# Altium PCB Venato_PCB_v1.PcbDoc (part 2 of 2)
Units mm, origin at the board's own origin, x right, y up, seen from the top; angles counter-clockwise.
Board outline 80 x 50 mm, 2 copper layers (Top Layer, Bottom Layer); 79 components, 70 nets, 349 pads, 0 vias.
Unrouted connection lines stored in the file: 190.
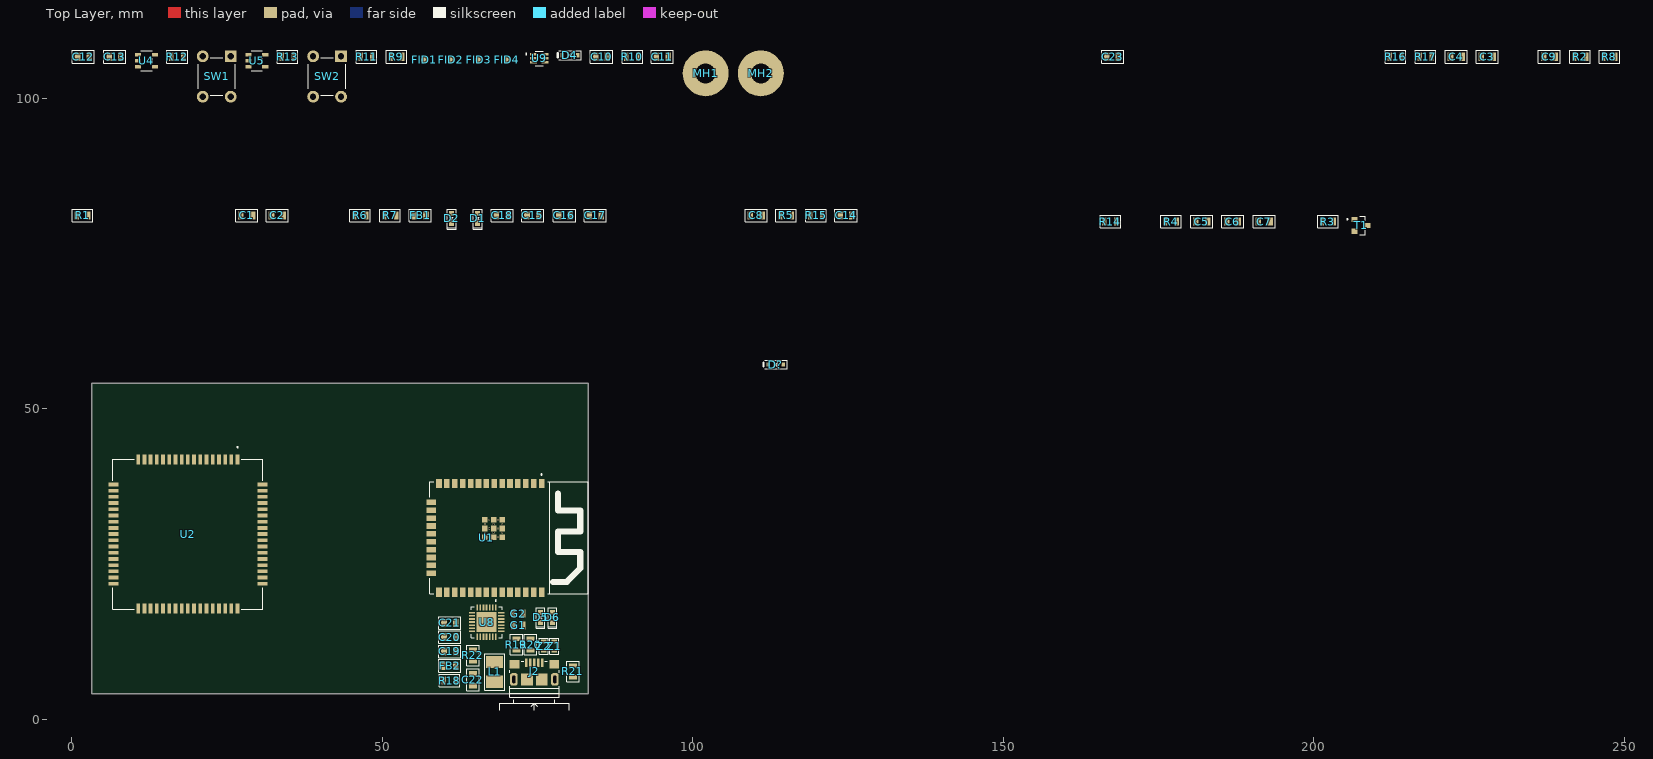
[diagram p0: Top Layer view]

## Part data (continued)
R8: library part RC0805FR-071K2L, "Res Thick Film 0805 1.2K Ohm 1% 0.125W(1/8W) ±100ppm/C Pad SMD T/R", Case Code (Imperial)=0805, Case Code (Metric)=2012, Manufacturer=Yageo, Max Operating Temperature=155°C, Max Power Dissipation=125mW, Min Operating Temperature=-55°C, Package Quantity=1, Resistance=1.2kR, Resistance Tolerance=1%, Resistor Type="Thick Film", Supplier Part Number 1=603-RC0805FR-071K2L, Temperature Coefficient=100ppm/°C, Voltage Rating=150V, Case/Package=0805, Category="Chip SMD Resistors", ComponentLink1Description=https://datasheet.ciiva.com/11808/0900766b8106beab-11808865.pdf?src-supplier=RSComponents, ComponentLink1URL=https://datasheet.ciiva.com/11808/0900766b8106beab-11808865.pdf?src-supplier=RSComponents, ComponentLink2Description=https://datasheet.ciiva.com/2457/pyu-r-int-thick-7-2457192.pdf?src-supplier=Digi-Key, ComponentLink2URL=https://datasheet.ciiva.com/2457/pyu-r-int-thick-7-2457192.pdf?src-supplier=Digi-Key, ComponentLink3Description=https://datasheet.ciiva.com/2457/pyu-r-int-thick-7-2457193.pdf?src-supplier=Digi-Key, ComponentLink3URL=https://datasheet.ciiva.com/2457/pyu-r-int-thick-7-2457193.pdf?src-supplier=Digi-Key, ComponentLink4Description=https://datasheet.ciiva.com/2457/pyu-r-int-thick-7-2457191.pdf?src-supplier=Digi-Key, ComponentLink4URL=https://datasheet.ciiva.com/2457/pyu-r-int-thick-7-2457191.pdf?src-supplier=Digi-Key, ComponentLink5Description=https://datasheet.ciiva.com/12656/rc0805-12656886.pdf?src-supplier=Mouser, ComponentLink5URL=https://datasheet.ciiva.com/12656/rc0805-12656886.pdf?src-supplier=Mouser, ComponentLink6Description=https://datasheet.ciiva.com/15189/getdatasheetpartid-348582-15189915.pdf?src-supplier=Verical, ComponentLink6URL=https://datasheet.ciiva.com/15189/getdatasheetpartid-348582-15189915.pdf?src-supplier=Verical, Construction=Rectangular, Depth=1.25mm, Features="Moisture Resistant", Height=0.024inch, Lead Free="Lead Free", Length=0.079inch, Manufacturer Part Number=RC0805FR-071K2L, Military Standard=Not, Number of Terminations=2, Packaging="Tape and Reel", Power Rating=125mW, Pricing 1="1=0.10000, 10=0.02900, 50=0.02900, 100=0.01400, 1000=0.00600, 10000=0.00300 (USD)", RoHS=Yes, RoHS Compliant=Yes, Series=RC, Stock 1=795, Supplier 1=Mouser, Technology="THICK FILM", Termination=SMD/SMT, Tolerance=1%, Width=0.049inch, Working Voltage=150V
R9 R10 R15: library part RC0805FR-071KL, "Res Thick Film 0805 1KOhm 1% 0.125W(1/8W) 100ppm/C Epoxy Pad SMD T/R", Case Code (Imperial)=0805, Case Code (Metric)=2012, Manufacturer=Yageo, Max Operating Temperature=155°C, Max Power Dissipation=125mW, Min Operating Temperature=-55°C, Package Quantity=1, Resistance=1kR, Resistance Tolerance=1%, Resistor Type="Thick Film", Supplier Part Number 1=311-1.00KCRTR-ND, Temperature Coefficient=100ppm/°C, Voltage Rating=150V, Case/Package=0805, Category="Chip SMD Resistors", Construction=Rectangular, Depth=1.25mm, Features="Moisture Resistant", Height=0.024inch, Lead Free="Lead Free", Length=0.079inch, Manufacturer Part Number=RC0805FR-071KL, Military Standard=Not, Number of Pins=2, Number of Terminations=2, Packaging="Tape and Reel", Power Rating=125mW, Pricing 1="5000=0.00544 (USD)", REACH SVHC=Unknown, RoHS=Yes, RoHS Compliant=Yes, Series=RC, Size Code=0805, Stock 1=5664551, Supplier 1=Digi-Key, Termination=SMD/SMT, Tolerance=1%, Voltage Rating (DC)=150V, Width=0.049inch
R11 R16 R17: library part RC0805FR-07560RL, "Res General Purpose Thick Film 0805 560 Ohm 1% 1/8W ±100ppm/°C Molded Paper T/R", Case Code (Imperial)=0805, Case Code (Metric)=2012, Manufacturer=Yageo, Max Operating Temperature=155°C, Max Power Dissipation=125mW, Min Operating Temperature=-55°C, Package Quantity=1, Resistance=560R, Resistance Tolerance=1%, Resistor Type="Thick Film", Supplier Part Number 1=311-560CRCT-ND, Temperature Coefficient=100ppm/°C, Voltage Rating=150V, Case/Package=0805, Category="Chip SMD Resistors", Construction=Rectangular, Depth=1.25mm, Features="Moisture Resistant", Height=0.024inch, Lead Free="Lead Free", Length=2mm, Manufacturer Part Number=RC0805FR-07560RL, Military Standard=Not, Number of Terminations=2, Packaging="Tape and Reel", Power Rating=125mW, Pricing 1="1=0.10000, 10=0.04200, 100=0.01690, 1000=0.00759, 2500=0.00659 (USD)", REACH SVHC=Unknown, RoHS=Yes, RoHS Compliant=Yes, Series=RC, Size Code=0805, Stock 1=450592, Supplier 1=Digi-Key, Termination=SMD/SMT, Tolerance=1%, Weight=0.000194oz, Width=0.049inch
R14: library part RC0805FR-07100RL, "Res Thick Film 0805 100 Ohm 1% 1/8W ±100ppm/°C Molded SMD Paper T/R", Case Code (Imperial)=0805, Case Code (Metric)=2012, Manufacturer=Yageo, Max Operating Temperature=155°C, Max Power Dissipation=125mW, Min Operating Temperature=-55°C, Package Quantity=5000, Resistance=100R, Resistor Type="Thick Film", Supplier Part Number 1=603-RC0805FR-07100RL, Temperature Coefficient=100ppm/°C, Tolerance=1%, Voltage Rating=150V, Application(s)="HIGH RELIABILITY", Case/Package=0805, Category="Chip SMD Resistors", ComponentLink1Description=https://datasheet.ciiva.com/11808/0900766b8106beab-11808877.pdf?src-supplier=RSComponents, ComponentLink1URL=https://datasheet.ciiva.com/11808/0900766b8106beab-11808877.pdf?src-supplier=RSComponents, ComponentLink2Description=https://datasheet.ciiva.com/7941/1697719-7941680.pdf?src-supplier=Element14, ComponentLink2URL=https://datasheet.ciiva.com/7941/1697719-7941680.pdf?src-supplier=Element14, ComponentLink3Description=https://datasheet.ciiva.com/7660/38627-7660797.pdf?src-supplier=Element14, ComponentLink3URL=https://datasheet.ciiva.com/7660/38627-7660797.pdf?src-supplier=Element14, ComponentLink4Description=https://datasheet.ciiva.com/2456/pyu-r-int-thick-7-2456987.pdf?src-supplier=Digi-Key, ComponentLink4URL=https://datasheet.ciiva.com/2456/pyu-r-int-thick-7-2456987.pdf?src-supplier=Digi-Key, ComponentLink5Description=https://datasheet.ciiva.com/17082/rc0805-17082697.pdf?src-supplier=Future+Electronics, ComponentLink5URL=https://datasheet.ciiva.com/17082/rc0805-17082697.pdf?src-supplier=Future+Electronics, ComponentLink6Description=https://datasheet.ciiva.com/7941/1686128-7941679.pdf?src-supplier=Element14, ComponentLink6URL=https://datasheet.ciiva.com/7941/1686128-7941679.pdf?src-supplier=Element14, ComponentLink7Description=https://datasheet.ciiva.com/22747/444164-22747535.pdf?src-supplier=Element14, ComponentLink7URL=https://datasheet.ciiva.com/22747/444164-22747535.pdf?src-supplier=Element14, ComponentLink8Description=https://datasheet.ciiva.com/46447/444164-46447562.pdf?src-supplier=Element14, ComponentLink8URL=https://datasheet.ciiva.com/46447/444164-46447562.pdf?src-supplier=Element14, ComponentLink9Description=https://datasheet.ciiva.com/2456/pyu-r-int-thick-7-2456988.pdf?src-supplier=Digi-Key, ComponentLink9URL=https://datasheet.ciiva.com/2456/pyu-r-int-thick-7-2456988.pdf?src-supplier=Digi-Key, ComponentLink10Description=https://datasheet.ciiva.com/2456/pyu-r-int-thick-7-2456989.pdf?src-supplier=Digi-Key, ComponentLink10URL=https://datasheet.ciiva.com/2456/pyu-r-int-thick-7-2456989.pdf?src-supplier=Digi-Key, Depth=1.25mm, Features="Moisture Resistant", Height=0.5mm, Lead Free="Lead Free", Lead Pitch=0.4mm, Length=2mm, Manufacturer Part Number=RC0805FR-07100RL, Military Standard=Not, Number of Pins=2, Number of Terminations=2, Packaging="Cut Tape", Power Rating=125mW, Pricing 1="1=0.13000, 10=0.04400, 50=0.04400, 100=0.01800, 1000=0.00900, 10000=0.00500 (USD)", RoHS=Yes, RoHS Compliant=Yes, Series=RC, Stock 1=1014956, Supplier 1=Mouser, Technology="THICK FILM", Termination=SMD/SMT, Type="General Purpose", Voltage Rating (DC)=150V, Weight=0.000917oz, Width=1.25mm
R19 R20: library part RC0805FR-0722RL, "Res SMD 0805 22R 1% 0.125W T.C.100PPM", Case Code (Imperial)=0805, Case Code (Metric)=2012, Manufacturer=Yageo, Max Operating Temperature=155°C, Max Power Dissipation=125mW, Min Operating Temperature=-55°C, Package Quantity=1, Resistance=22R, Resistance Tolerance=1%, Resistor Type="Thick Film", Supplier Part Number 1=311-22.0CRCT-ND, Temperature Coefficient=100ppm/°C, Voltage Rating=150V, Case/Package=0805, Category="Chip SMD Resistors", ComponentLink1Description=https://datasheet.ciiva.com/11819/0900766b8106beab-11819837.pdf?src-supplier=RSComponents, ComponentLink1URL=https://datasheet.ciiva.com/11819/0900766b8106beab-11819837.pdf?src-supplier=RSComponents, ComponentLink2Description=https://datasheet.ciiva.com/46447/444164-46447574.pdf?src-supplier=Element14, ComponentLink2URL=https://datasheet.ciiva.com/46447/444164-46447574.pdf?src-supplier=Element14, ComponentLink3Description=https://datasheet.ciiva.com/2457/pyu-r-int-thick-7-2457045.pdf?src-supplier=Digi-Key, ComponentLink3URL=https://datasheet.ciiva.com/2457/pyu-r-int-thick-7-2457045.pdf?src-supplier=Digi-Key, ComponentLink4Description=https://datasheet.ciiva.com/2457/pyu-r-int-thick-7-2457046.pdf?src-supplier=Digi-Key, ComponentLink4URL=https://datasheet.ciiva.com/2457/pyu-r-int-thick-7-2457046.pdf?src-supplier=Digi-Key, ComponentLink5Description=https://datasheet.ciiva.com/2457/pyu-r-int-thick-7-2457044.pdf?src-supplier=Digi-Key, ComponentLink5URL=https://datasheet.ciiva.com/2457/pyu-r-int-thick-7-2457044.pdf?src-supplier=Digi-Key, ComponentLink6Description=https://datasheet.ciiva.com/12667/rc0805-12667371.pdf?src-supplier=Mouser, ComponentLink6URL=https://datasheet.ciiva.com/12667/rc0805-12667371.pdf?src-supplier=Mouser, Construction=Rectangular, Depth=1.25mm, Features="Moisture Resistant", Height=0.024inch, Lead Free="Lead Free", Length=0.079inch, Manufacturer Part Number=RC0805FR-0722RL, Military Standard=Not, Number of Terminations=2, Packaging="Tape and Reel", Power Rating=125mW, Pricing 1="1=0.10000, 10=0.04200, 100=0.01690, 1000=0.00759, 2500=0.00659 (USD)", REACH SVHC=Unknown, RoHS=Yes, RoHS Compliant=Yes, Series=RC, Stock 1=203007, Supplier 1=Digi-Key, Technology="THICK FILM", Termination=SMD/SMT, Tolerance=1%, Width=0.049inch, Working Voltage=150V
R21: library part RC0805JR-070RL, "RC Series 0805 0.125 W 0 Ohm Jumper Surface Mount Thick Film Chip Resistor", Case Code (Imperial)=0805, Case Code (Metric)=2012, Manufacturer=Yageo, Max Operating Temperature=155°C, Max Power Dissipation=125mW, Min Operating Temperature=-55°C, Resistance=0mR, Resistance Tolerance=5%, Resistor Type="Thick Film", Supplier Part Number 1=311-0.0ARCT-ND, Temperature Coefficient=200ppm/°C, Voltage Rating=150V, Case/Package=0805, Category="Chip SMD Resistors", ComponentLink1Description=https://datasheet.ciiva.com/7941/1738694-7941861.pdf?src-supplier=Element14, ComponentLink1URL=https://datasheet.ciiva.com/7941/1738694-7941861.pdf?src-supplier=Element14, ComponentLink2Description=https://datasheet.ciiva.com/11819/0900766b8106beab-11819430.pdf?src-supplier=RSComponents, ComponentLink2URL=https://datasheet.ciiva.com/11819/0900766b8106beab-11819430.pdf?src-supplier=RSComponents, ComponentLink3Description=https://datasheet.ciiva.com/7941/1738694-7941862.pdf?src-supplier=Element14, ComponentLink3URL=https://datasheet.ciiva.com/7941/1738694-7941862.pdf?src-supplier=Element14, ComponentLink4Description=https://datasheet.ciiva.com/7941/1738694-7941863.pdf?src-supplier=Element14, ComponentLink4URL=https://datasheet.ciiva.com/7941/1738694-7941863.pdf?src-supplier=Element14, ComponentLink5Description=https://datasheet.ciiva.com/15190/getdatasheetpartid-330685-15190028.pdf?src-supplier=Verical, ComponentLink5URL=https://datasheet.ciiva.com/15190/getdatasheetpartid-330685-15190028.pdf?src-supplier=Verical, Construction=Rectangular, Contact Plating=Tin,Matte, Depth=1.25mm, Features="Moisture Resistant", Height=0.5mm, Lead Free="Lead Free", Length=2mm, Manufacturer Part Number=RC0805JR-070RL, Military Standard=Not, Number of Pins=2, Number of Terminations=2, Packaging="Tape and Reel", Power Rating=125mW, Pricing 1="1=0.10000, 10=0.03100, 25=0.02240, 50=0.01720, 100=0.01260, 250=0.00964, 500=0.00770, 1000=0.00567 (USD)", Radiation Hardening=No, REACH SVHC=Unknown, RoHS=Yes, RoHS Compliant=Yes, Series=RC, Size Code=0805, Stock 1=3244701, Supplier 1=Digi-Key, Technology="THICK FILM", Termination=SMD/SMT, Tolerance=5%, Voltage Rating (DC)=150V, Width=1.25mm
SW1 SW2: "Switch Tactile OFF (ON) SPST Round Button PC Pins 0.05A 24VDC 1.57N Thru-Hole Loose", Actuator Color=Black, Contact Current Rating=50mA, Contact Resistance=100mR, Manufacturer="TE Connectivity Alcoswitch", Max Operating Temperature=85°C, Max Voltage Rating (DC)=24V, Min Operating Temperature=-35°C, Operating Force=160gf, Package Quantity=750, Supplier Part Number 1=450-1650-ND, Actuator Length=0.055inch, Actuator Material=PBT, Actuator Type=Standard, Category="Pushbutton Switches", ComponentLink1Description=https://datasheet.ciiva.com/30199/1825910-6rqpn1825910-6-30199520.pdf?src-supplier=Onlinecomponents.com, ComponentLink1URL=https://datasheet.ciiva.com/30199/1825910-6rqpn1825910-6-30199520.pdf?src-supplier=Onlinecomponents.com, ComponentLink2Description=https://datasheet.ciiva.com/15184/getdatasheetpartid-395915-15184509.pdf?src-supplier=Verical, ComponentLink2URL=https://datasheet.ciiva.com/15184/getdatasheetpartid-395915-15184509.pdf?src-supplier=Verical, Contact Material="Copper Alloy", Contact Plating=Silver, Electrical Life=100000Cycles, ELV=Compliant, Illumination Type=Non-Illuminated,Illuminated, Lead Free="Lead Free", Length=5.99mm, Manufacturer Part Number=1825910-6, Max Current Rating=50mA, Mechanical Life=100000Cycles, Mount="Through Hole", Orientation=Straight, Packaging="Loose Piece", Pricing 1="1=0.12000, 10=0.11300, 25=0.10720, 100=0.09750, 250=0.09164, 500=0.08382, 1000=0.07018, 2500=0.06823, 5000=0.06433 (USD)", REACH SVHC=Unknown, RoHS=Yes, RoHS Compliant=Yes, Series=FSMJ, Stock 1=147083, Supplier 1=Digi-Key, Switch Function=Off-Mom, Switch Travel=0.25mm, Termination="PC Pins", Throw Configuration=SPST, Type=Switch
T1: "Transistor Mosfet N-ch 60V 0.3A 3-PIN SOT-23 T/r"
U1: "2.4 GHz WiFi + Bluetooth ® + Bluetooth LE module / Built around ESP32 series of SoCs, Xtensa® dualcore 32bit LX6 microprocessor / 4/8/16 MB flash available / 26 GPIOs, rich set of peripherals / Onboard PCB antenna or external antenna connector", Manufacturer="Espressif Systems", Supplier Part Number 1=1965-ESP32-WROOM-32E-N8CT-ND, Category=Uncategorized, Manufacturer Part Number=ESP32-WROOM-32E-N8, Pricing 1="1=3.30000 (USD)", RoHS=No, Stock 1=16701, Supplier 1=Digi-Key
U2: "GSM/GPRS + GPS + Bluetooth Module SIM808 S2-1060C-Z1F05 SIMCOM; 850/900/1800/1900MHz"
U3: "Vcc=6V Ic=1A   ESOP-8 Battery Management ICs ROHS", Manufacturer=TPOWER, Supplier Part Number 1=C382139, Manufacturer Part Number=TP4056, Pricing 1="5=0.12500, 50=0.10080, 150=0.08880, 500=0.07970, 2500=0.07250, 4000=0.06890 (USD)", RoHS=No, Stock 1=30410, Supplier 1=LCSC
U4 U5: "Single 2-input, 2-V to 5.5-V AND gate with open-drain outputs 5-SOT-23 -55 to 125", Case/Package=SOT-23, Low Level Output Current=8mA, Manufacturer="Texas Instruments", Max Operating Temperature=125°C, Max Supply Voltage=5.5V, Min Operating Temperature=-55°C, Min Supply Voltage=2V, Output Current=25mA, Package Quantity=3000, Quiescent Current=1uA, Supplier Part Number 1=296-29202-1-ND, Category="Logic Gates", ComponentLink1Description=https://datasheet.ciiva.com/1864/sn74ahc1g09-1864410.pdf?src-supplier=Digi-Key, ComponentLink1URL=https://datasheet.ciiva.com/1864/sn74ahc1g09-1864410.pdf?src-supplier=Digi-Key, ComponentLink2Description=https://datasheet.ciiva.com/1864/sn74ahc1g09-1864411.pdf?src-supplier=Digi-Key, ComponentLink2URL=https://datasheet.ciiva.com/1864/sn74ahc1g09-1864411.pdf?src-supplier=Digi-Key, ComponentLink3Description=https://datasheet.ciiva.com/1864/sn74ahc1g09-1864412.pdf?src-supplier=Digi-Key, ComponentLink3URL=https://datasheet.ciiva.com/1864/sn74ahc1g09-1864412.pdf?src-supplier=Digi-Key, Contact Plating=Tin,Matte, Lead Free="Lead Free", Logic Function="AND GATE", Manufacturer Part Number=SN74AHC1G09DBVR, Mount="Surface Mount", Number of Bits=1, Number of Circuits=1, Number of Elements=1, Number of Gates=1, Number of Inputs=2, Number of Outputs=1, Number of Pins=5, Output Voltage=5.5V, Packaging="Tape and Reel", Pricing 1="1=0.48000, 10=0.35600, 25=0.31160, 100=0.20170, 250=0.16696, 500=0.13356, 1000=0.10240 (USD)", Propagation Delay=7.5ns, Radiation Hardening=No, REACH SVHC="No SVHC", RoHS=Yes, RoHS Compliant=Yes, Series=74AHC, Supplier 1=Digi-Key, Technology=CMOS
U6: "SOT-23-6L Battery Management ICs ROHS", Manufacturer=TF, Supplier Part Number 1=C436931, Category=Uncategorized, Manufacturer Part Number=DW01A, Pricing 1="20=0.03790, 200=0.03100, 600=0.02760, 3000=0.02500, 9000=0.02290, 21000=0.02190 (USD)", RoHS=No, Stock 1=1180, Supplier 1=LCSC
U7: "输入电容(Ciss@Vds)：466pF 10V 反向传输电容(Crss@Vds)：58pF 10V 功率(Pd)：1.5W 阈值电压(Vgs(th)@Id)：700mV 250uA 导通电阻(RDS(on)@Vgs,Id)：19.5mΩ 4.5V,3A 栅极电荷(Qg@Vgs)：5.7nC 10V 漏源电压(Vdss)：20V 连续漏极电流(Id)：6A 工作温度(最大值)：+150℃ (Tj) 工作温度(最小值)：-55℃ (Tj) 类型：2个N沟道", Manufacturer="Tech Public", Supplier Part Number 1=C2830320, Manufacturer Part Number=FS8205A, Pricing 1="10=0.06550, 100=0.05310, 300=0.04690, 3000=0.04230, 6000=0.03860, 9000=0.03670 (USD)", RoHS=No, Stock 1=20790, Supplier 1=LCSC
U8: "Full Speed USB to UART Bridge USB 2.0 3.3V T/R Automotive 28-Pin QFN EP", Manufacturer="Silicon Labs", Supplier Part Number 1=634-CP2102NA02QFN28R, Category="USB Interface ICs", Manufacturer Part Number=CP2102N-A02-GQFN28R, Pricing 1="1=2.27000, 10=2.27000, 50=2.27000, 100=2.27000, 1000=2.27000, 10000=2.27000 (USD)", RoHS=Yes, Supplier 1=Mouser
U9: "TRANS 2NPN PREBIAS 0.15W UMT6", Case/Package=SOT-363, Collector Base Voltage (VCBO)=50V, Collector-emitter Voltage-Max=300mV, Continuous Collector Current=100mA, Emitter Base Voltage (VEBO)=5V, Manufacturer=Rohm, Max Operating Temperature=150°C, Max Power Dissipation=150mW, Min Operating Temperature=-55°C, Package Quantity=3000, Supplier Part Number 1=UMH3NTNCT-ND, Transition Frequency=250MHz, Category=BJTs, Collector Emitter Breakdown Voltage=50V, Collector Emitter Voltage (VCEO)=50V, ComponentLink1Description=https://datasheet.ciiva.com/22711/1645293-22711825.pdf?src-supplier=Element14, ComponentLink1URL=https://datasheet.ciiva.com/22711/1645293-22711825.pdf?src-supplier=Element14, ComponentLink2Description=https://datasheet.ciiva.com/29322/140593-da-01-en-transistor-umh3-ntn-sot-363-29322757.pdf?src-supplier=Conrad, ComponentLink2URL=https://datasheet.ciiva.com/29322/140593-da-01-en-transistor-umh3-ntn-sot-363-29322757.pdf?src-supplier=Conrad, ComponentLink3Description=https://datasheet.ciiva.com/1193/1645293-1193640.pdf?src-supplier=Element14, ComponentLink3URL=https://datasheet.ciiva.com/1193/1645293-1193640.pdf?src-supplier=Element14, ComponentLink4Description=https://datasheet.ciiva.com/969/umh3n-969834.pdf?src-supplier=Digi-Key, ComponentLink4URL=https://datasheet.ciiva.com/969/umh3n-969834.pdf?src-supplier=Digi-Key, ComponentLink5Description=https://datasheet.ciiva.com/969/umh3n-969835.pdf?src-supplier=Digi-Key, ComponentLink5URL=https://datasheet.ciiva.com/969/umh3n-969835.pdf?src-supplier=Digi-Key, ComponentLink6Description=https://datasheet.ciiva.com/969/umh3n-969833.pdf?src-supplier=Digi-Key, ComponentLink6URL=https://datasheet.ciiva.com/969/umh3n-969833.pdf?src-supplier=Digi-Key, Current Rating=100mA, Element Configuration=Dual, hFE Min=100, Lead Free="Lead Free", Manufacturer Part Number=UMH3NTN, Max Breakdown Voltage=50V, Max Collector Current=100mA, Max Output Current=100mA, Mount="Surface Mount", Number of Pins=6, Operating Supply Voltage=50V, Packaging="Tape and Reel", Polarity=NPN, Power Dissipation=150mW, Pricing 1="1=0.48000, 10=0.36200, 100=0.22560, 500=0.15434, 1000=0.11872 (USD)", Radiation Hardening=No, Reach SVHC Compliant=Yes, RoHS=Yes, RoHS Compliant=Yes, Series=-, Stock 1=14510, Supplier 1=Digi-Key, Voltage Rating (DC)=50V
Z1 Z2: "ESD Suppressor Multilayer Varistor 5V Automotive 2-Pin Case 0603(1608Metric) T/R", Capacitance=0.5pF, Case Code (Imperial)=0603, Case Code (Metric)=1608, Clamping Voltage=20V, Current Rating=50nA, Manufacturer=Bourns, Max Operating Temperature=85°C, Max Voltage Rating (DC)=5V, Min Operating Temperature=-40°C, Package Quantity=1, Supplier Part Number 1=CG0603MLC-05ETR-ND, Voltage Rating (AC)=8V, Case/Package=0603, Category=Varistors, ComponentLink1Description=https://datasheet.ciiva.com/27747/1163231-27747629.pdf?src-supplier=Jameco, ComponentLink1URL=https://datasheet.ciiva.com/27747/1163231-27747629.pdf?src-supplier=Jameco, ComponentLink2Description=https://datasheet.ciiva.com/30070/mlc-30070503.pdf?src-supplier=Onlinecomponents.com, ComponentLink2URL=https://datasheet.ciiva.com/30070/mlc-30070503.pdf?src-supplier=Onlinecomponents.com, ComponentLink3Description=https://datasheet.ciiva.com/6991/mlc-6991832.pdf?src-supplier=Digi-Key, ComponentLink3URL=https://datasheet.ciiva.com/6991/mlc-6991832.pdf?src-supplier=Digi-Key, ComponentLink4Description=https://datasheet.ciiva.com/6991/mlc-6991834.pdf?src-supplier=Digi-Key, ComponentLink4URL=https://datasheet.ciiva.com/6991/mlc-6991834.pdf?src-supplier=Digi-Key, ComponentLink5Description=https://datasheet.ciiva.com/6991/mlc-6991836.pdf?src-supplier=Digi-Key, ComponentLink5URL=https://datasheet.ciiva.com/6991/mlc-6991836.pdf?src-supplier=Digi-Key, ComponentLink6Description=https://datasheet.ciiva.com/1278/1785244-1278701.pdf?src-supplier=Element14, ComponentLink6URL=https://datasheet.ciiva.com/1278/1785244-1278701.pdf?src-supplier=Element14, ComponentLink7Description=https://datasheet.ciiva.com/22696/1785244-22696318.pdf?src-supplier=Element14, ComponentLink7URL=https://datasheet.ciiva.com/22696/1785244-22696318.pdf?src-supplier=Element14, ComponentLink8Description=https://datasheet.ciiva.com/25958/mlc-25958222.pdf?src-supplier=Avnet+Europe, ComponentLink8URL=https://datasheet.ciiva.com/25958/mlc-25958222.pdf?src-supplier=Avnet+Europe, ComponentLink9Description=https://datasheet.ciiva.com/8084/mlc-8084047.pdf?src-supplier=Avnet, ComponentLink9URL=https://datasheet.ciiva.com/8084/mlc-8084047.pdf?src-supplier=Avnet, Contact Plating=Tin, Depth=0.8mm, Element Configuration=Single, Leakage Current=50nA, Length=1.6mm, Manufacturer Part Number=CG0603MLC-05E, Number of Channels=1, Number of Circuits=1, Number of Pins=2, Operating Supply Voltage=5V, Packaging="Tape and Reel", Pricing 1="5000=0.08840, 10000=0.08060, 25000=0.07540, 50000=0.06916 (USD)", Radiation Hardening=No, REACH SVHC="No SVHC", RoHS=Yes, RoHS Compliant=Yes, Series=MLC, Stock 1=69840, Supplier 1=Digi-Key, Termination=SMD/SMT, Thickness=0.8mm, Turn-On Delay Time=1ns, Voltage=5V, Voltage Rating (DC)=5V, Width=0.8mm, Working Voltage=5V

## Nets (pads, with @x,y where several pads share a name; then routed paths per layer and width w, separated by ;. In a path a pad name is that pad's centre, name@x,y a point inside that pad or via, vN(x,y) a via of type N, cw(c..) or ccw(c..) an arc to the next point about the centre after c; other vN are vias at no path point)
+3.7V_B: BA0017.1 C5.2 C6.2 C7.2 C9.2 C10.2 C11.2 D4.1 D?.1 FB1.1 FB2.1 R1.1 R2.1 R5.1 R9.2 R10.2 R14.2 R16.2 R17.2 R18.2 U2.4 U2.5 U2.6 U3.5 U4.5 U5.5
+5V: C23.2 D1.2 D2.2 L1.2 U3.4 U3.8
+5V_USB: C22.2 J2.1 L1.1 U8.8
-VBAT: BA0017.2 C14.1 U6.6 U7.3
BTN_RSTn: D4.2 R9.1 R12.1 SW1.1 SW1.2
CON_USB_N: J2.2 R19.1 Z2.2
CON_USB_P: J2.3 R20.1 Z1.2
CTS: U8.23
DCD: U8.1
DSR: U8.27
DTR: U8.28 U9.2 U9.4
ESP32_BUF_RSTn: C12.1 R12.2 U4.1 U4.2
ESP32_RESET: C4.2 R2.2 U1.3 U4.4 U9.6
ESP32_RX: G2.1 U1.34
ESP32_RX_G: G2.2 U8.26
ESP32_TX: G1.1 U1.35
ESP32_TX_G: G1.2 U8.25
GND: C1.1 C2.1 C3.1 C4.1 C5.1 C6.1 C7.1 C8.1 C9.1 C10.1 C11.1 C12.2 C13.2 C15.1 C16.1 C17.1 C18.1 C19.1 C20.1 C21.1 C22.1 C23.1 D?.2 J1.5 J2.5 J2.6 J2.7 J2.8 J2.9 J2.10 J2.11 MH1.1 MH2.1 R4.2 R8.1 R15.1 R21.2 R22.1 SW1.3 SW1.4 SW2.3 SW2.4 T1.1 U1.1 U1.15 U1.38 U1.39_1 U1.39_2 U1.39_3 U1.39_4 U1.39_5 U1.39_6 U1.39_7 U1.39_8 U1.39_9 U2.1 U2.2 U2.3 U2.18 U2.28 U2.34 U2.36 U2.40 U2.51 U2.52 U2.54 U2.64 U2.65 U2.67 U2.68 U3.1 U3.3 U4.3 U5.3 U7.1 U8.3 U8.29 Z1.1 Z2.1
IO0: C3.2 R1.2 U1.25 U9.3
IO2: R11.2 U1.24
IO5: U1.29
IO12: U1.14
IO13: U1.16
IO14: U1.13
IO15: U1.23
IO18: U1.30
IO19: U1.31
IO21: U1.33
IO22: U1.36
IO23: U1.37
IO25: U1.10
IO26: U1.11
IO27: U1.12
IO32: U1.8
IO33: U1.9
NetC1_2: C1.2 C2.2 FB1.2 U1.2
NetC14_2: C14.2 R14.1 U6.5
NetC19_2: C19.2 C20.2 C21.2 FB2.2 U8.6 U8.7
NetD1_1: D1.1 R7.2
NetD2_1: D2.1 R6.2
NetD5_1: D5.1 U8.19
NetD5_2: D5.2 R16.1
NetD6_1: D6.1 U8.18
NetD6_2: D6.2 R17.1
NetJ2_4: J2.4 R21.1
NetR3_2: R3.2 R4.1 T1.3
NetR5_2: R5.2 U2.16
NetR6_1: R6.1 U3.7
NetR7_1: R7.1 U3.6
NetR8_2: R8.2 U3.2
NetR11_1: R11.1 U5.4
NetR15_2: R15.2 U6.2
NetR18_1: R18.1 U8.9
NetR19_2: R19.2 U8.5
NetR20_2: R20.2 U8.4
NetR22_2: R22.2 U8.11
NetT1_2: T1.2 U2.8
NetU6_1: U6.1 U7.6
NetU6_3: U6.3 U7.4
RI: U8.2
RTS: U8.24 U9.1 U9.5
SIM808_RX: U1.28 U2.15
SIM808_TX: U1.27 U2.14
SIM_CLK: C17.2 J1.3 U2.31
SIM_DATA: C18.2 J1.7 U2.30
SIM_ON: R3.1 U1.26
SIM_RST: C16.2 J1.2 U2.32
SIM_VDD: C15.2 J1.1 U2.29
USER_BUTTON: R10.1 R13.1 SW2.1 SW2.2
USER_BUTTON_BUFF: C13.1 R13.2 U5.1 U5.2
pads on no net: C8.2 FID1.1 FID2.1 FID3.1 FID4.1 J1.6 J1.P1 J1.P2 J1.P3 J1.P4 U1.4 U1.5 U1.6 U1.7 U1.17 U1.18 U1.19 U1.20 U1.21 U1.22 U1.32 U1.39_10 U1.39_11 U1.39_12 U1.39_13 U1.39_14 U1.39_15 U1.39_16 U1.39_17 U1.39_18 U1.39_19 U1.39_20 U1.39_21 U2.7 U2.9 U2.10 U2.11 U2.12 U2.13 U2.17 U2.19 U2.20 U2.21 U2.22 U2.23 U2.24 U2.25 U2.26 U2.27 U2.33 U2.35 U2.37 U2.38 U2.39 U2.41 U2.42 U2.43 U2.44 U2.45 U2.46 U2.47 U2.48 U2.49 U2.50 U2.53 U2.55 U2.56 U2.57 U2.58 U2.59 U2.60 U2.61 U2.62 U2.63 U2.66 U3.9 U6.4 U7.2 U7.5 U8.10 U8.12 U8.13 U8.14 U8.15 U8.16 U8.17 U8.20 U8.21 U8.22